# Altium PCB PCB Layout.PcbDoc (part 1 of 3)
Units mm, origin at the board's own origin, x right, y up, seen from the top; angles counter-clockwise.
Board outline 100.03 x 55.01 mm, 4 copper layers (Top Layer, Signal Layer 2, Signal Layer 1, Bottom Layer), stack 0.779 mm thick; 236 components, 218 nets, 813 pads, 395 vias.
Unrouted connection lines stored in the file: 15.
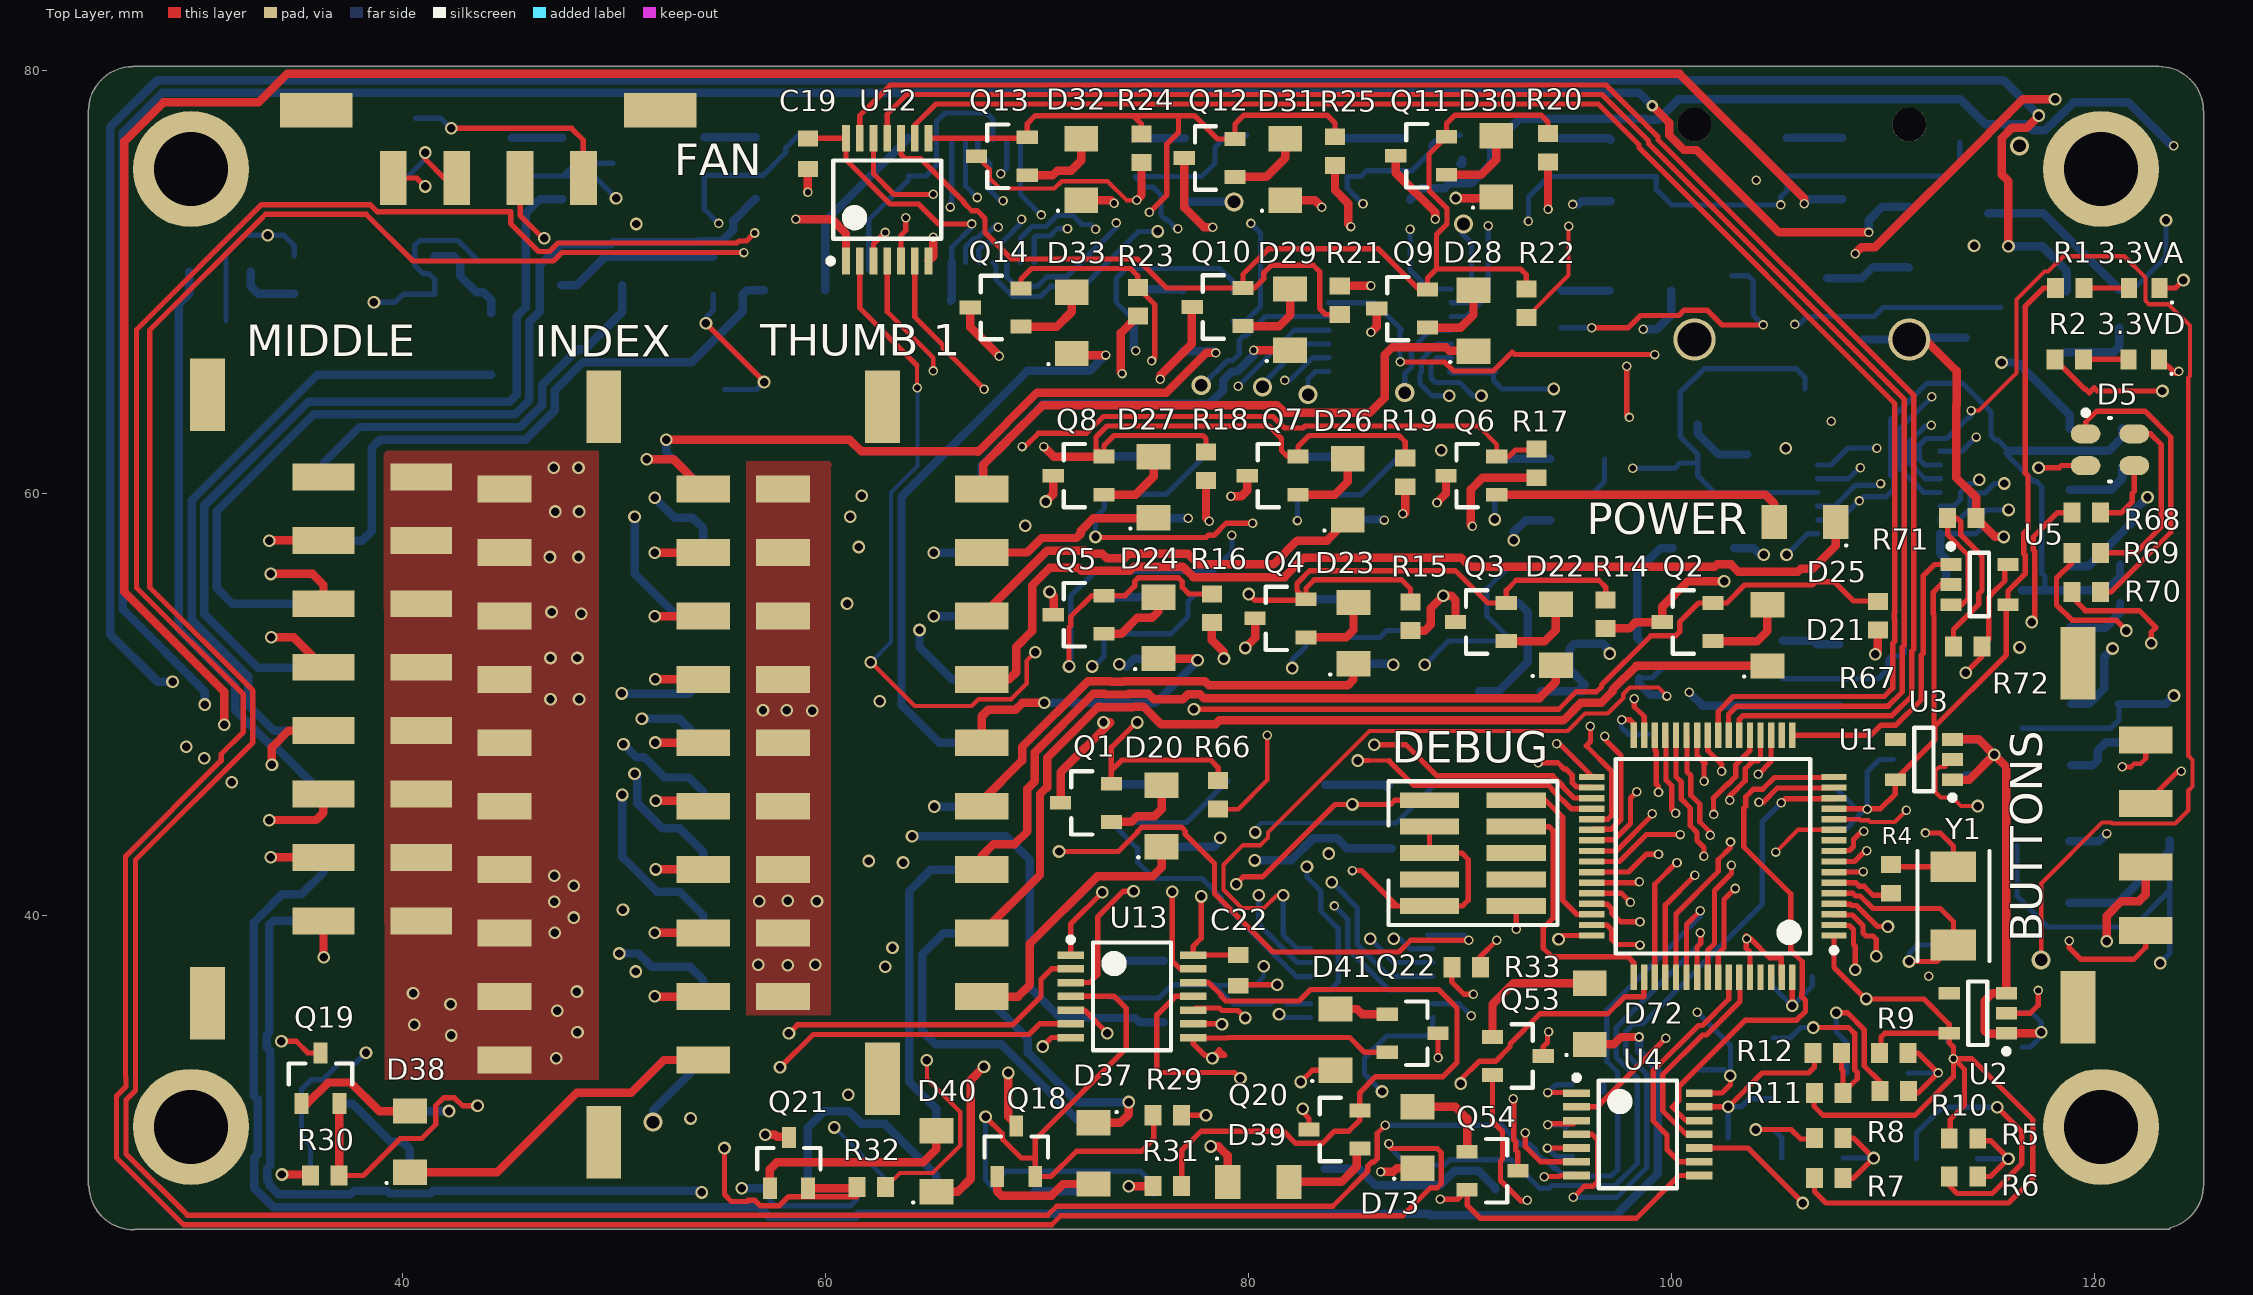
[diagram p0: Top Layer view]
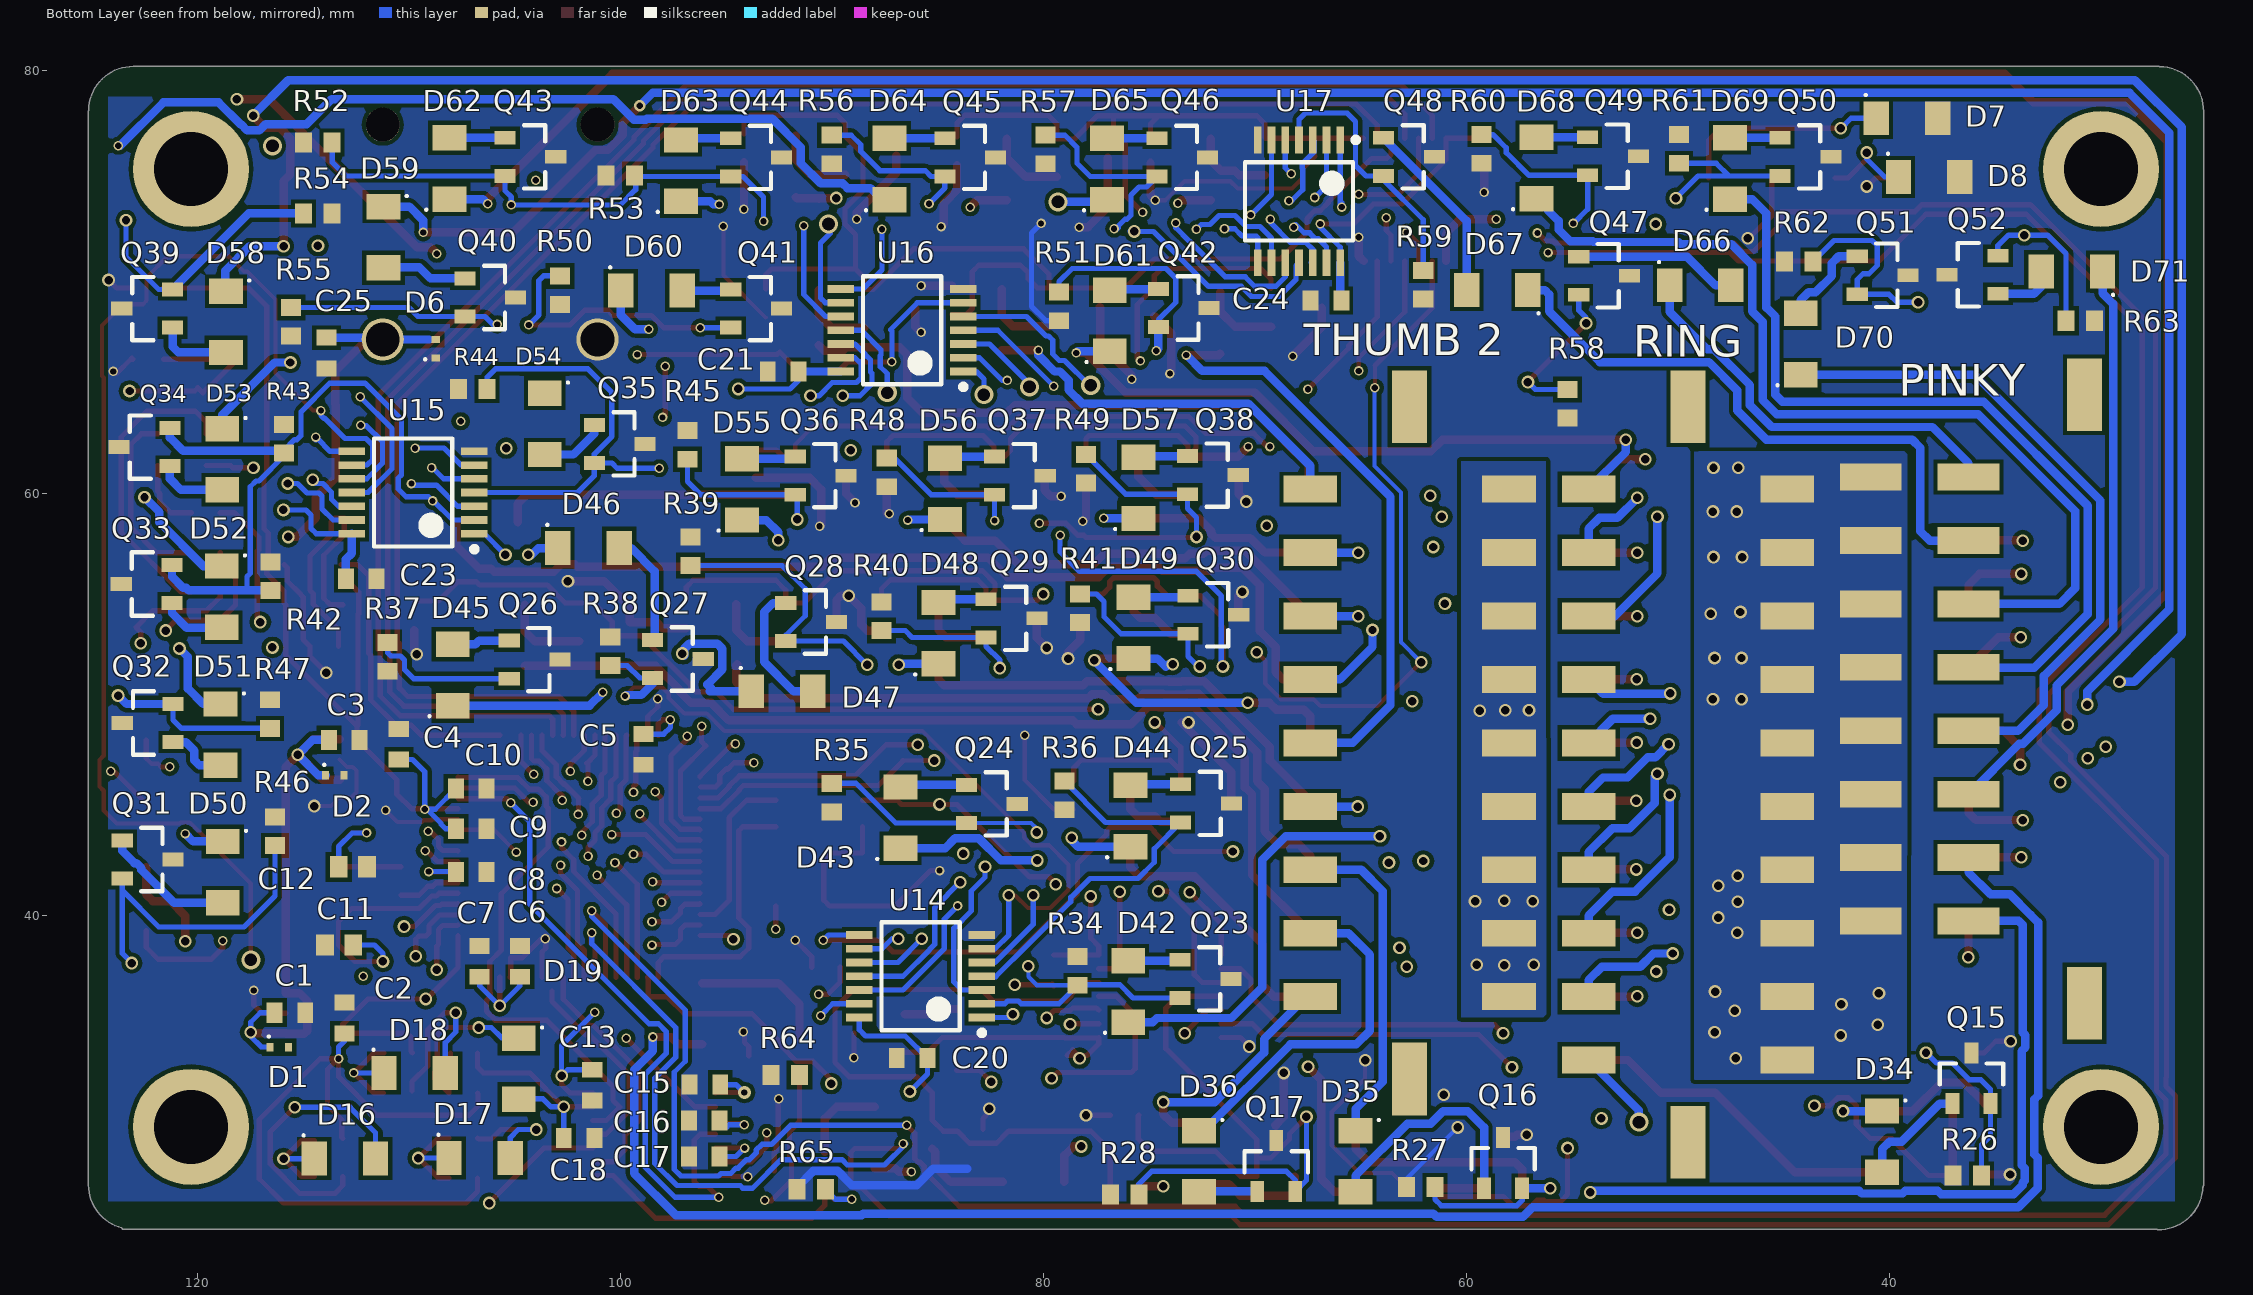
[diagram p1: Bottom Layer view, seen from below]
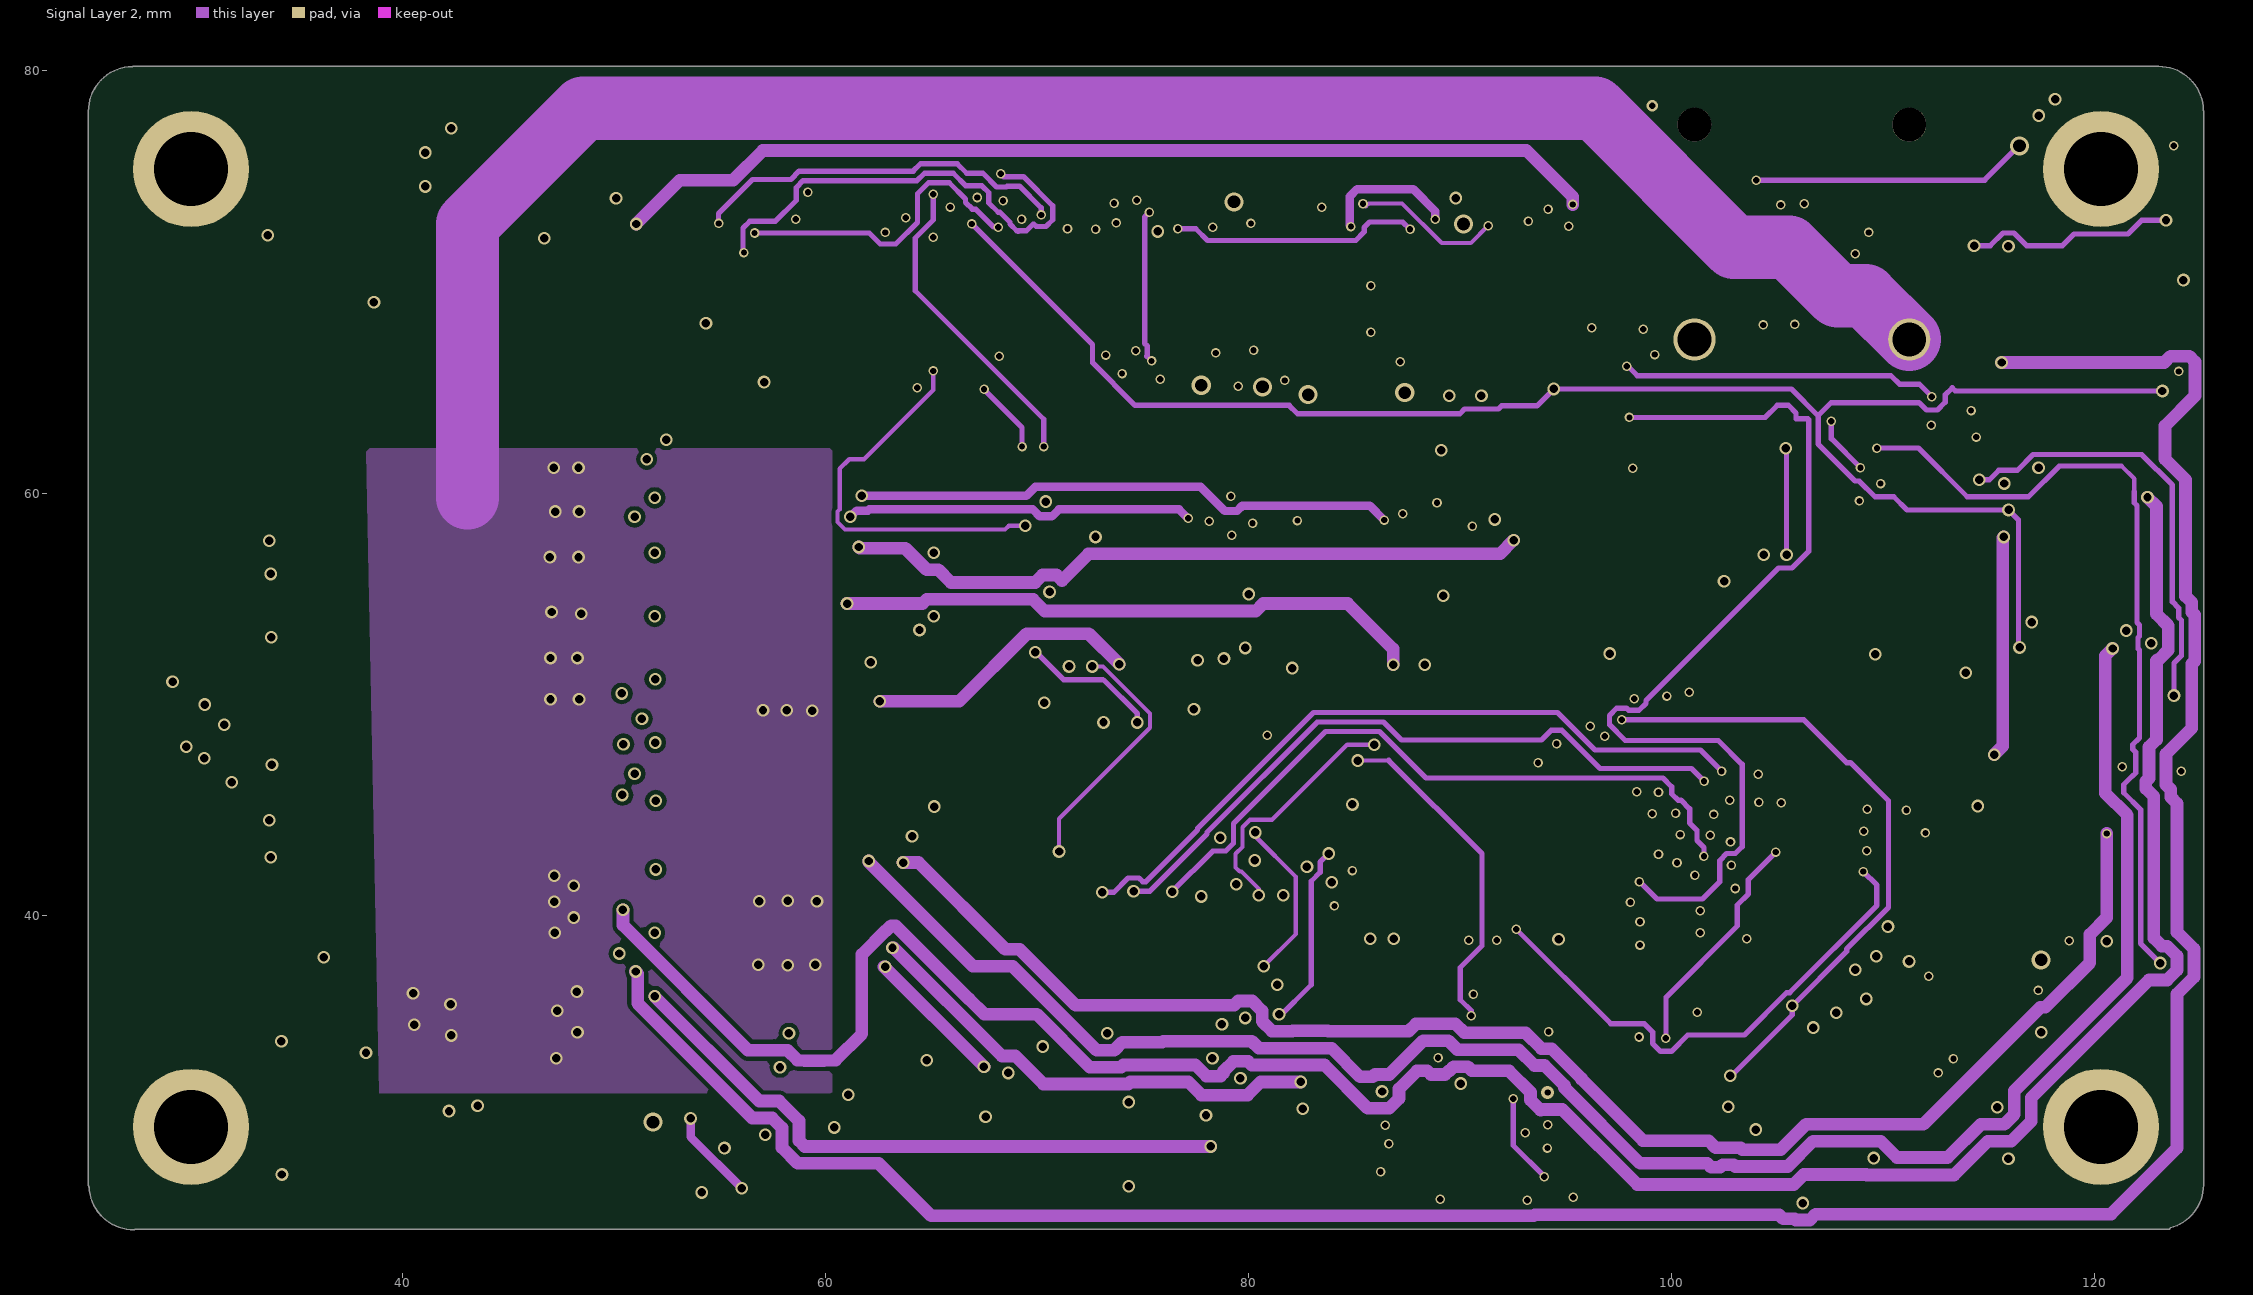
[diagram p2: Signal Layer 2]
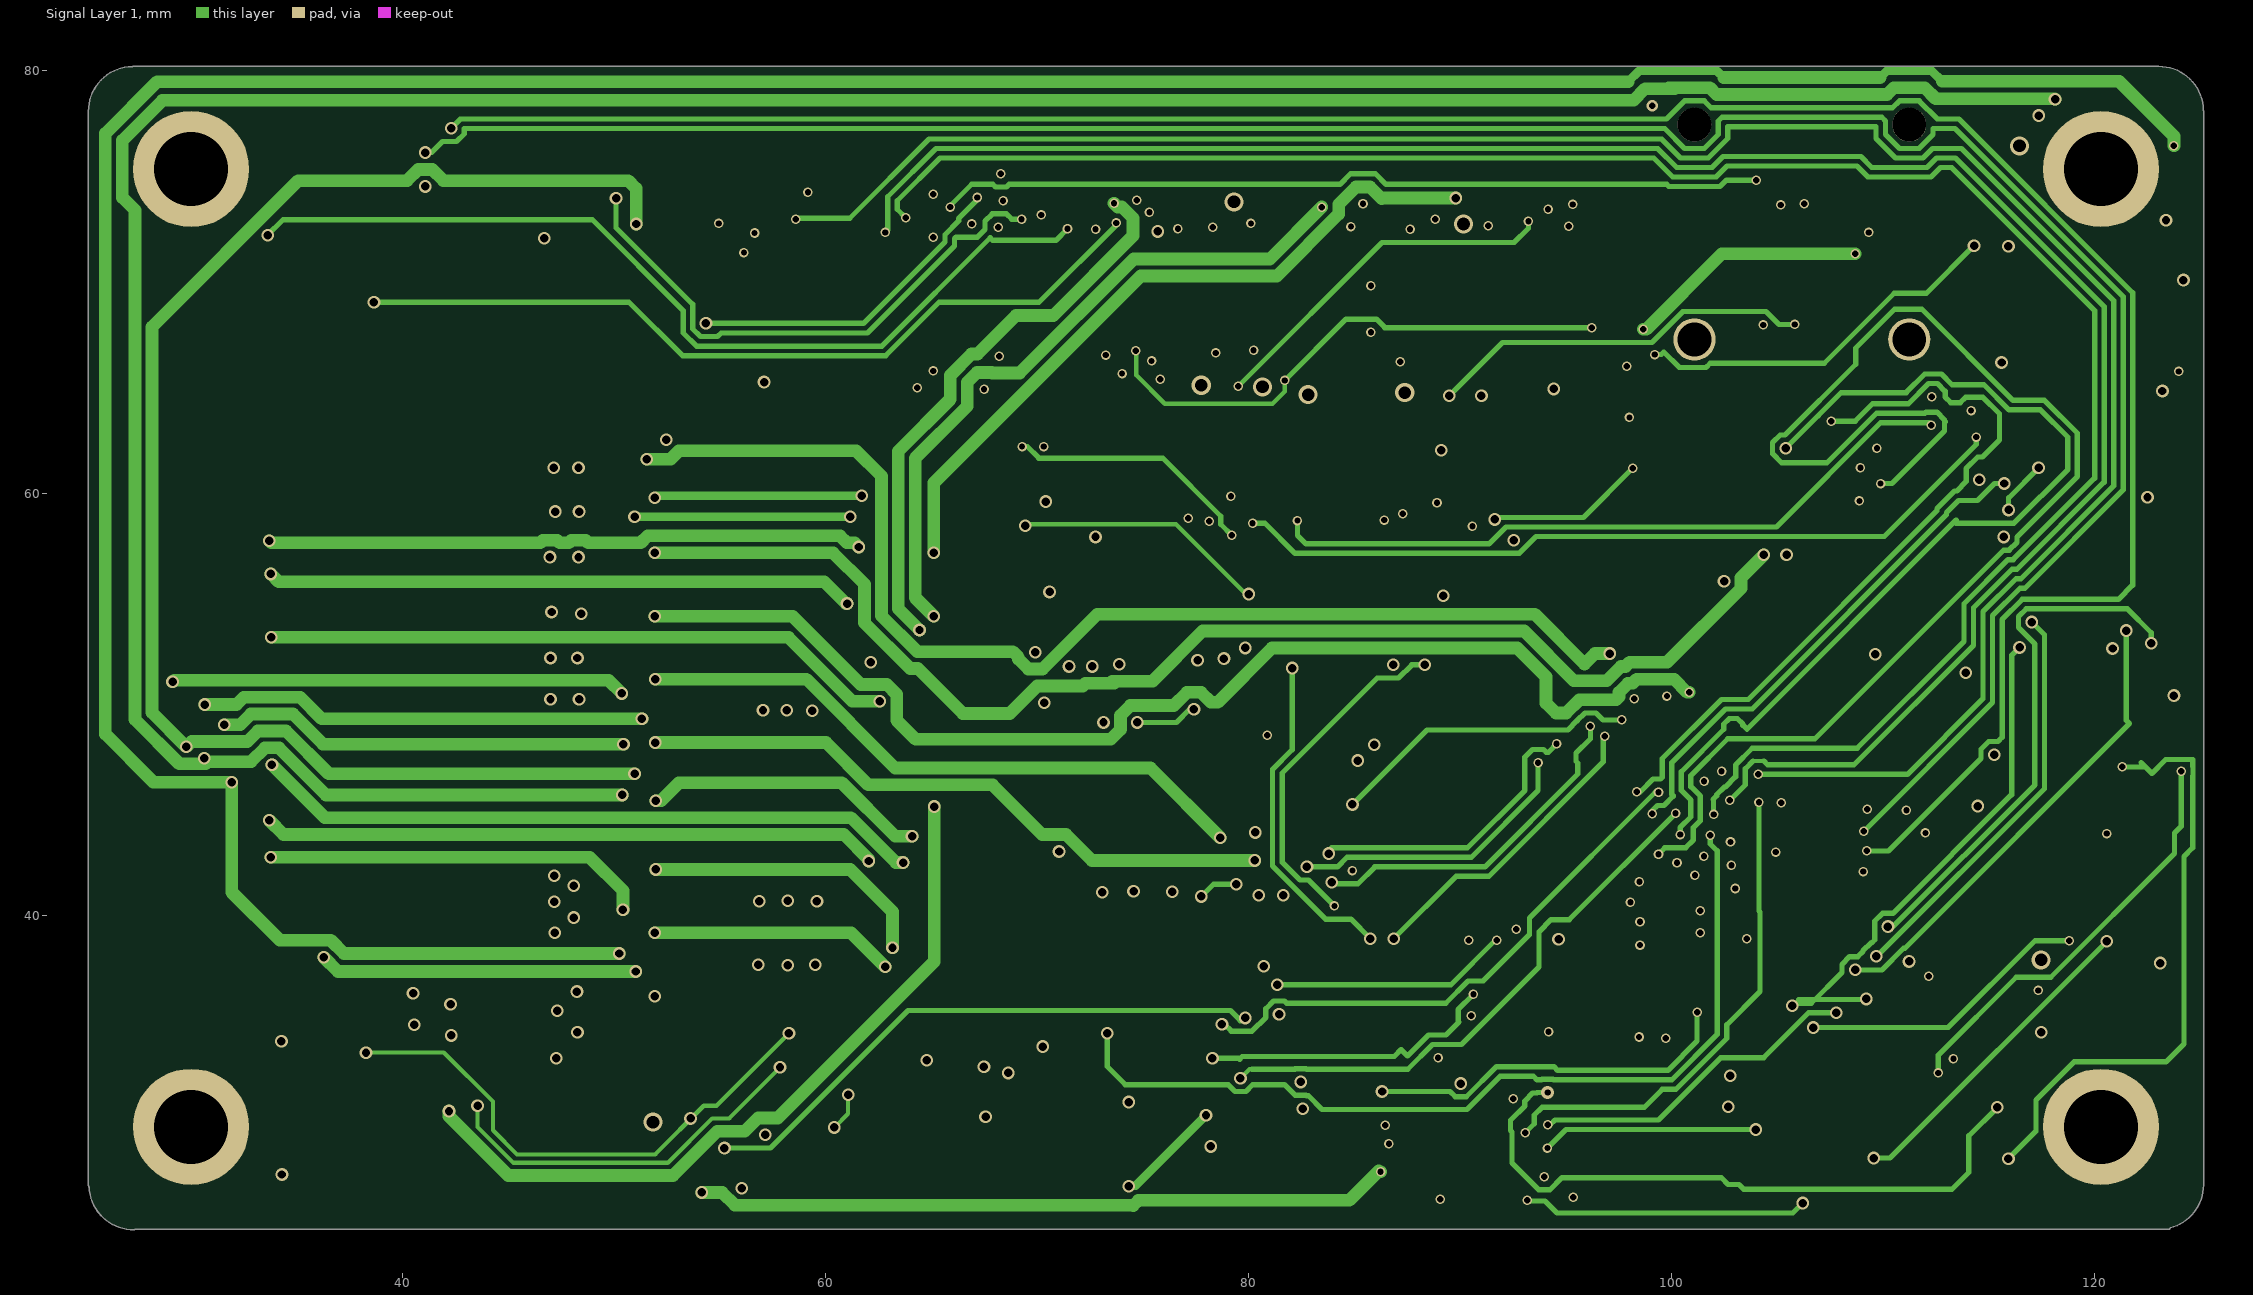
[diagram p3: Signal Layer 1]

## Layer stack, top to bottom
Top Solder: solder mask 0.01, Solder Resist, Dk 3.5
Top Layer: signal copper 0.036
Dielectric 1: prepreg 0.127, FR-4, Dk 4.2
Signal Layer 2: signal copper 0.036
Dielectric 3: core 0.254, Dk 4.2
Signal Layer 1: signal copper 0.036
Dielectric 2: core 0.254, Dk 4.2
Bottom Layer: signal copper 0.036
Bottom Solder: solder mask 0.01, Solder Resist, Dk 3.5

## Board outline
25.176,27.182 cw(c25.25,27.25) 25.15,27.25 25.15,78.047 cw(c25.25,78.052) 25.15,78.051 cw(c27.25,78.069) 27.214,80.169 cw(c27.25,80.075) 27.25,80.175 123.047,80.175 cw(c123.052,80.075) 123.051,80.175 cw(c123.069,78.075) 125.169,78.11 cw(c125.075,78.075) 125.175,78.075 125.175,27.312 cw(c125.075,27.3) 125.176,27.301 cw(c123.075,27.283) 125.176,27.283 cw(c123.075,27.283) 123.597,25.249 cw(c123.501,25.275) 123.501,25.175 27.344,25.175 cw(c27.303,25.266) 27.304,25.166 cw(c27.286,27.278)

## Design rules (kind name [scope] priority, off if disabled: settings)
Clearance [All] p1: gap=0.2 except(0.18: Arc-Arc)
ComponentClearance [All] p1: gap=0.75 collisioncheckmode=3 verticalgap=2540 showdistances=FALSE
DiffPairsRouting [All] p1: maxlimit=10 minlimit=0.2 mostfreqgap=0.25 toplayer_minwidth=0.2 toplayer_maxwidth=10 toplayer_prefwidth=0.25 midlayer1_minwidth=0.2 midlayer1_maxwidth=10 midlayer1_prefwidth=0.25 midlayer2_minwidth=0.2 midlayer2_maxwidth=10 midlayer2_prefwidth=0.25 bottomlayer_minwidth=0.2 bottomlayer_maxwidth=10 bottomlayer_prefwidth=0.25 maxuncoupledlength=12.7
Height [All] p1: minheight=0 maxheight=100 prefheight=0
HoleSize [All] p1: absolutevalues=TRUE maxlimit=12 minlimit=0.3 maxpercent=80.000 minpercent=20.000
HoleToHoleClearance [All] p1: gap=0.25 allowstackedmicrovias=TRUE
MinimumSolderMaskSliver [All] p1: minsoldermaskwidth=0.05
PlaneClearance [All] p1: clearance=0.5
PlaneConnect [All] p1: planeconnectstyle=Relief reliefexpansion=0.25 reliefentries=4 reliefconductorwidth=0.25 reliefairgap=0.25
PolygonConnect [All] p1: connectstyle=Direct reliefconductorwidth=0.25 reliefentries=4 polygonreliefangle="90 Angle" airgapwidth=0.15
RoutingCorners [All] p1: cornerstyle=45-Degree minsetback=2.5 maxsetback=2.5
RoutingVias [All] p1: holewidth=0.4 width=0.6 viastyle="Through Hole" minholewidth=0.3 minwidth=0.45 maxholewidth=0.4 maxwidth=0.6
SilkToSilkClearance [All] p1: silktosilkclearance=0.25
SilkToSolderMaskClearance [IsPad] p1: minsilkscreentomaskgap=0.1 clearancetoexposedcopper=TRUE
SolderMaskExpansion [All] p1: expansion=0.1
Width [All] p1: maxlimit=3 minlimit=0.2 preferedwidth=0.2 toplayer_maxwidth=0.6 midlayer2_maxwidth=0.6 bottomlayer_maxwidth=0.4 minimp=50.000000 maximp=50.000000 favimp=50.000000
19 further rules are at their usual default settings.

## Classes and differential pairs
component class FLEX_OUTPUT: 0.2 C19 C20 C21 C22 C23 C24 D20 D21 D22 D23 D24 D25 D26 D27 D28 D29 D30 D31 D32 D33 D34 D35 D36 D37 D38 D39 D40 D41 D42 D43 D44 D45 D46 D47 D48 D49 D50 D51 D52 D53 D54 D55 D56 D57 D58 D59 D60 D61 D62 D63 D64 D65 D66 D67 D68 D69 D70 D71 D72 D73 Q1 Q2 Q3 Q4 Q5 Q6 Q7 Q8 Q9 Q10 Q11 Q12 Q13 Q14 Q15 Q16 Q17 Q18 Q19 Q20 Q21 Q22 Q23 Q24 Q25 Q26 Q27 Q28 Q29 Q30 Q31 Q32 Q33 Q34 Q35 Q36 Q37 Q38 Q39 Q40 Q41 Q42 Q43 Q44 Q45 Q46 Q47 Q48 Q49 Q50 Q51 Q52 Q53 Q54 R14 R15 R16 R17 R18 R19 R20 R21 R22 R23 R24 R25 R26 R27 R28 R29 R30 R31 R32 R33 R34 R35 R36 R37 R38 R39 R40 R41 R42 R43 R44 R45 R46 R47 R48 R49 R50 R51 R52 R53 R54 R55 R56 R57 R58 R59 R60 R61 R62 R63 R64 R65 R66 R67 U12 U13 U14 U15 U16 U17
component class FLEX_MCU_CONFIG: 3.3VA 3.3VD BUTTONS C1 C2 C3 C4 C5 C6 C7 C8 C9 C10 C11 C12 C13 C15 C16 C17 C18 C25 D1 D2 D5 D6 D7 D8 D16 D17 D18 D19 DEBUG FAN INDEX J1 J2 J8 MIDDLE PINKY POWER R1 R2 R4 R5 R6 R7 R8 R9 R10 R11 R12 R68 R69 R70 R71 R72 RING "THUMB 1" "THUMB 2" U1 U2 U3 U4 U5 Y1

## Components (designator, comment, footprint, x,y, rotation, side; value= is the part's Value field where it differs from the comment)
3.3VA "LTST-C193KGKT-5A" "Lite-On LTST-C193K-Series (1608)" 122.375,69.7 r0 top (schematic designator D3)
3.3VD "LTST-C193KGKT-5A" "Lite-On LTST-C193K-Series (1608)" 122.35,66.325 r0 top (schematic designator D4)
BUTTONS "Fan Header" 4PIN_POWERHEADER 121.175,48.95 r270 top locked (schematic designator J8)
C1 "" "TDK C-Series (1608)" 115.65,35.425 r0 bottom
C2 "" "TDK C-Series (1608)" 113.075,35.175 r270 bottom
C3 "" "TDK C-Series (1608)" 113.075,48.325 r0 bottom
C4 "" "TDK C-Series (1608)" 110.5,48.125 r270 bottom
C5 "" "TDK C-Series (1608)" 98.925,47.875 r90 bottom
C6 "Cap" "TDK C-Series (1608)" 104.775,37.85 r270 bottom
C7 "" "TDK C-Series (1608)" 106.675,37.85 r270 bottom
C8 "" "TDK C-Series (1608)" 107.075,42.075 r0 bottom
C9 "" "TDK C-Series (1608)" 107.075,44.125 r0 bottom
C10 "" "TDK C-Series (1608)" 107.075,46.025 r0 bottom
C11 "" "Johanson S-Series (1608)" 113.325,38.625 r0 bottom
C12 "" "Johanson S-Series (1608)" 112.675,42.325 r180 bottom
C13 "Cap" "TDK C-Series (1608)" 101.35,32 r90 bottom
C15 "Cap" "TDK C-Series (1608)" 96.025,32.025 r180 bottom
C16 "Cap" "TDK C-Series (1608)" 96.05,30.325 r180 bottom
C17 "Cap" "TDK C-Series (1608)" 96.05,28.625 r180 bottom
C18 "Cap" "TDK C-Series (1608)" 101.975,29.5 r0 bottom
C19 "Cap" "TDK C-Series (1608)" 59.175,76.05 r90 top
C20 "Cap" "TDK C-Series (1608)" 86.225,33.275 r180 bottom
C21 "Cap" "TDK C-Series (1608)" 92.325,65.75 r180 bottom
C22 "Cap" "TDK C-Series (1608)" 79.525,37.425 r90 top
C23 "Cap" "TDK C-Series (1608)" 112.275,55.95 r0 bottom
C24 "Cap" "TDK C-Series (1608)" 66.65,69.1 r180 bottom
C25 "" "TDK C-Series (1608)" 113.925,66.625 r90 bottom
D1 "" DIODE_TVS 116.15,33.8 r180 bottom
D2 "" DIODE_TVS 113.525,46.65 r180 bottom
D5 "Cree CLVBA-FKA-CAEDH8BBB7A363" "Cree CLVBA-FKA-Series (4-SOJ)" 120.75,62.05 r0 top
D6 "Diode BAT17" DIODE_TVS 108.75,66.825 r90 bottom
D7 "Diode 1N4006" DIODE_SHOTTKY 39.175,77.725 r180 bottom
D8 "Diode 1N4006" DIODE_SHOTTKY 38.125,74.95 r180 bottom
D16 "de" DIODE_SHOTTKY 113.05,28.525 r180 bottom
D17 "de" DIODE_SHOTTKY 106.675,28.55 r180 bottom
D18 "de" DIODE_SHOTTKY 109.75,32.575 r180 bottom
D19 "de" DIODE_SHOTTKY 104.825,32.775 r270 bottom
D20 "de" DIODE_SHOTTKY 75.9,44.725 r90 top
D21 "de" DIODE_SHOTTKY 104.55,53.275 r90 top
D22 "de" DIODE_SHOTTKY 94.55,53.3 r90 top
D23 "de" DIODE_SHOTTKY 84.975,53.375 r90 top
D24 "de" DIODE_SHOTTKY 75.75,53.625 r90 top
D25 "de" DIODE_SHOTTKY 106.325,58.625 r180 top
D26 "de" DIODE_SHOTTKY 84.7,60.175 r90 top
D27 "de" DIODE_SHOTTKY 75.525,60.275 r90 top
D28 "de" DIODE_SHOTTKY 90.65,68.15 r90 top
D29 "de" DIODE_SHOTTKY 81.975,68.2 r90 top
D30 "de" DIODE_SHOTTKY 91.725,75.45 r90 top
D31 "de" DIODE_SHOTTKY 81.75,75.3 r90 top
D32 "de" DIODE_SHOTTKY 72.1,75.3 r90 top
D33 "de" DIODE_SHOTTKY 71.65,68.05 r90 top
D34 "de" DIODE_SHOTTKY 40.35,29.325 r270 bottom
D35 "de" DIODE_SHOTTKY 65.25,28.4 r270 bottom
D36 "de" DIODE_SHOTTKY 72.65,28.4 r270 bottom
D37 "de" DIODE_SHOTTKY 72.675,28.775 r270 top
D38 "de" DIODE_SHOTTKY 40.35,29.325 r90 top
D39 "de" DIODE_SHOTTKY 80.475,27.425 r0 top
D40 "de" DIODE_SHOTTKY 65.25,28.4 r90 top
D41 "de" DIODE_SHOTTKY 84.125,34.15 r90 top
D42 "de" DIODE_SHOTTKY 76,36.425 r90 bottom
D43 "de" DIODE_SHOTTKY 86.775,44.65 r90 bottom
D44 "de" DIODE_SHOTTKY 75.9,44.725 r90 bottom
D45 "de" DIODE_SHOTTKY 107.95,51.4 r90 bottom
D46 "de" DIODE_SHOTTKY 101.525,57.4 r180 bottom
D47 "de" DIODE_SHOTTKY 92.375,50.625 r180 bottom
D48 "de" DIODE_SHOTTKY 84.975,53.375 r90 bottom
D49 "de" DIODE_SHOTTKY 75.75,53.625 r90 bottom
D50 "de" DIODE_SHOTTKY 118.825,42.075 r270 bottom
D51 "de" DIODE_SHOTTKY 118.925,48.575 r270 bottom
D52 "de" DIODE_SHOTTKY 118.875,55.1 r270 bottom
D53 "de" DIODE_SHOTTKY 118.85,61.6 r270 bottom
D54 "de" DIODE_SHOTTKY 103.6,63.275 r270 bottom
D55 "de" DIODE_SHOTTKY 94.275,60.175 r90 bottom
D56 "de" DIODE_SHOTTKY 84.675,60.2 r90 bottom
D57 "de" DIODE_SHOTTKY 75.525,60.25 r90 bottom
D58 "de" DIODE_SHOTTKY 118.675,68.1 r270 bottom
D59 "de" DIODE_SHOTTKY 111.225,72.1 r270 bottom
D60 "de" DIODE_SHOTTKY 98.55,69.575 r180 bottom
D61 "de" DIODE_SHOTTKY 76.875,68.15 r90 bottom
D62 "de" DIODE_SHOTTKY 108.1,75.35 r90 bottom
D63 "de" DIODE_SHOTTKY 97.15,75.25 r90 bottom
D64 "de" DIODE_SHOTTKY 87.3,75.325 r90 bottom
D65 "de" DIODE_SHOTTKY 77,75.325 r90 bottom
D66 "de" DIODE_SHOTTKY 48.95,69.825 r180 bottom
D67 "de" DIODE_SHOTTKY 58.55,69.6 r0 bottom
D68 "de" DIODE_SHOTTKY 56.7,75.375 r90 bottom
D69 "de" DIODE_SHOTTKY 47.55,75.35 r90 bottom
D70 "de" DIODE_SHOTTKY 44.2,67.05 r90 bottom
D71 "de" DIODE_SHOTTKY 31.375,70.475 r0 bottom
D72 "de" DIODE_SHOTTKY 96.15,35.375 r90 top
D73 "de" DIODE_SHOTTKY 88,29.525 r90 top
DEBUG "Cortex Debugger" "Samtec FTSH-105-01-L-DV-K" 90.625,42.975 r0 top (schematic designator J7)
FAN "Fan Header" 4PIN_POWERHEADER 49.2,76.175 r180 top locked (schematic designator J10)
INDEX "20 Pin Header" 20PIN_UP_CONNECTOR 52.95,60.825 r270 top locked (schematic designator J1)
MIDDLE "16" 16PIN_RA_CONNECTOR 39.425,61.4 r270 top locked (schematic designator J5)
PINKY "16" 16PIN_RA_CONNECTOR 39.425,39.125 r90 bottom locked (schematic designator J6)
POWER "Power Header" 2PIN_TERMINAL_BLOCK 101.1,77.425 r0 top locked (schematic designator J9)
Q1 "" "MOSFET SOT90P236X110-3N" 72.325,45.35 r180 top
Q2 "" "MOSFET SOT90P236X110-3N" 100.775,53.9 r180 top
Q3 "" "MOSFET SOT90P236X110-3N" 91,53.9 r180 top
Q4 "" "MOSFET SOT90P236X110-3N" 81.525,54.075 r180 top
Q5 "" "MOSFET SOT90P236X110-3N" 71.975,54.25 r180 top
Q6 "" "MOSFET SOT90P236X110-3N" 90.55,60.825 r180 top
Q7 "" "MOSFET SOT90P236X110-3N" 81.15,60.825 r180 top
Q8 "" "MOSFET SOT90P236X110-3N" 71.975,60.825 r180 top
Q9 "" "MOSFET SOT90P236X110-3N" 87.275,68.725 r180 top
Q10 "" "MOSFET SOT90P236X110-3N" 78.55,68.8 r180 top
Q11 "" "MOSFET SOT90P236X110-3N" 88.175,75.95 r180 top
Q12 "" "MOSFET SOT90P236X110-3N" 78.175,75.85 r180 top
Q13 "" "MOSFET SOT90P236X110-3N" 68.35,75.925 r180 top
Q14 "" "MOSFET SOT90P236X110-3N" 68.05,68.775 r180 top
Q15 "" "MOSFET SOT90P236X110-3N" 36.125,32.325 r90 bottom
Q16 "" "MOSFET SOT90P236X110-3N" 58.275,28.325 r90 bottom
Q17 "" "MOSFET SOT90P236X110-3N" 69,28.175 r90 bottom
Q18 "" "MOSFET SOT90P236X110-3N" 69.025,28.875 r90 top
Q19 "" "MOSFET SOT90P236X110-3N" 36.125,32.325 r90 top
Q20 "" "MOSFET SOT90P236X110-3N" 84.075,29.9 r180 top
Q21 "" "MOSFET SOT90P236X110-3N" 58.275,28.325 r90 top
Q22 "" "MOSFET SOT90P236X110-3N" 87.775,34.45 r0 top
Q23 "" "MOSFET SOT90P236X110-3N" 72.35,37.025 r180 bottom
Q24 "" "MOSFET SOT90P236X110-3N" 82.45,45.3 r180 bottom
Q25 "" "MOSFET SOT90P236X110-3N" 72.325,45.325 r180 bottom
Q26 "" "MOSFET SOT90P236X110-3N" 104.075,52.125 r180 bottom
Q27 "" "MOSFET SOT90P236X110-3N" 97.3,52.15 r180 bottom
Q28 "" "MOSFET SOT90P236X110-3N" 91,53.9 r180 bottom
Q29 "" "MOSFET SOT90P236X110-3N" 81.525,54.075 r180 bottom
Q30 "" "MOSFET SOT90P236X110-3N" 71.975,54.25 r180 bottom
Q31 "" "MOSFET SOT90P236X110-3N" 122.375,42.675 r180 bottom
Q32 "" "MOSFET SOT90P236X110-3N" 122.375,49.125 r0 bottom
Q33 "" "MOSFET SOT90P236X110-3N" 122.425,55.7 r0 bottom
Q34 "" "MOSFET SOT90P236X110-3N" 122.525,62.175 r0 bottom
Q35 "" "MOSFET SOT90P236X110-3N" 100.05,62.325 r180 bottom
Q36 "" "MOSFET SOT90P236X110-3N" 90.55,60.825 r180 bottom
Q37 "" "MOSFET SOT90P236X110-3N" 81.125,60.825 r180 bottom
Q38 "" "MOSFET SOT90P236X110-3N" 72,60.85 r180 bottom
Q39 "" "MOSFET SOT90P236X110-3N" 122.4,68.725 r0 bottom
Q40 "" "MOSFET SOT90P236X110-3N" 106.175,69.25 r180 bottom
Q41 "" "MOSFET SOT90P236X110-3N" 93.6,68.725 r180 bottom
Q42 "" "MOSFET SOT90P236X110-3N" 73.375,68.75 r180 bottom
Q43 "" "MOSFET SOT90P236X110-3N" 104.275,75.9 r180 bottom
Q44 "" "MOSFET SOT90P236X110-3N" 93.6,75.875 r180 bottom
Q45 "" "MOSFET SOT90P236X110-3N" 83.475,75.875 r180 bottom
Q46 "" "MOSFET SOT90P236X110-3N" 73.45,75.875 r180 bottom
Q47 "" "MOSFET SOT90P236X110-3N" 53.5,70.275 r180 bottom
Q48 "" "MOSFET SOT90P236X110-3N" 62.725,75.9 r180 bottom
Q49 "" "MOSFET SOT90P236X110-3N" 53.075,75.925 r180 bottom
Q50 "" "MOSFET SOT90P236X110-3N" 43.975,75.9 r180 bottom
Q51 "" "MOSFET SOT90P236X110-3N" 40.325,70.3 r180 bottom
Q52 "" "MOSFET SOT90P236X110-3N" 36.075,70.325 r0 bottom
Q53 "" "MOSFET SOT90P236X110-3N" 92.75,33.375 r0 top
Q54 "" "MOSFET SOT90P236X110-3N" 91.55,27.95 r0 top
R1 "" "Panasonic ERJ-Series (1608)" 118.85,69.7 r180 top
R2 "" "Panasonic ERJ-Series (1608)" 118.825,66.325 r180 top
R4 "" "Panasonic ERJ-Series (1608)" 110.4,41.75 r270 top
R5 "" "Panasonic ERJ-Series (1608)" 113.825,29.475 r0 top
R6 "" "Panasonic ERJ-Series (1608)" 113.825,27.675 r0 top
R7 "" "Panasonic ERJ-Series (1608)" 107.45,27.6 r0 top
R8 "" "Panasonic ERJ-Series (1608)" 107.45,29.5 r0 top
R9 "" "Panasonic ERJ-Series (1608)" 110.525,33.525 r0 top
R10 "" "Panasonic ERJ-Series (1608)" 110.55,31.725 r0 top
R11 "" "Panasonic ERJ-Series (1608)" 107.45,31.625 r0 top
R12 "" "Panasonic ERJ-Series (1608)" 107.375,33.525 r0 top
R14 "" "Panasonic ERJ-Series (1608)" 96.9,54.275 r90 top
R15 "" "Panasonic ERJ-Series (1608)" 87.675,54.175 r90 top
R16 "" "Panasonic ERJ-Series (1608)" 78.275,54.55 r90 top
R17 "" "Panasonic ERJ-Series (1608)" 93.625,61.4 r90 top
R18 "" "Panasonic ERJ-Series (1608)" 78,61.275 r90 top
R19 "" "Panasonic ERJ-Series (1608)" 87.425,60.975 r90 top
R20 "" "Panasonic ERJ-Series (1608)" 94.175,76.325 r90 top
R21 "" "Panasonic ERJ-Series (1608)" 84.325,69.125 r270 top
R22 "" "Panasonic ERJ-Series (1608)" 93.15,68.975 r90 top
R23 "" "Panasonic ERJ-Series (1608)" 74.775,69.05 r90 top
R24 "" "Panasonic ERJ-Series (1608)" 74.95,76.3 r90 top
R25 "" "Panasonic ERJ-Series (1608)" 84.1,76.175 r90 top
R26 "" "Panasonic ERJ-Series (1608)" 36.325,27.725 r180 bottom
R27 "" "Panasonic ERJ-Series (1608)" 62.175,27.175 r180 bottom
R28 "" "Panasonic ERJ-Series (1608)" 76.175,26.825 r180 bottom
R29 "" "Panasonic ERJ-Series (1608)" 76.175,30.575 r180 top
R30 "" "Panasonic ERJ-Series (1608)" 36.325,27.725 r0 top
R31 "" "Panasonic ERJ-Series (1608)" 76.175,27.225 r0 top
R32 "" "Panasonic ERJ-Series (1608)" 62.175,27.175 r180 top
R33 "" "Panasonic ERJ-Series (1608)" 90.3,37.575 r180 top
R34 "" "Panasonic ERJ-Series (1608)" 78.4,37.4 r270 bottom
R35 "" "Panasonic ERJ-Series (1608)" 90.025,45.6 r90 bottom
R36 "" "Panasonic ERJ-Series (1608)" 79.025,45.7 r90 bottom
R37 "" "Panasonic ERJ-Series (1608)" 111.025,52.25 r90 bottom
R38 "" "Panasonic ERJ-Series (1608)" 100.5,52.525 r270 bottom
R39 "" "Panasonic ERJ-Series (1608)" 96.7,57.25 r270 bottom
R40 "" "Panasonic ERJ-Series (1608)" 87.675,54.175 r270 bottom
R41 "" "Panasonic ERJ-Series (1608)" 78.275,54.55 r90 bottom
R42 "" "Panasonic ERJ-Series (1608)" 116.575,56.075 r270 bottom
R43 "" "Panasonic ERJ-Series (1608)" 115.925,62.575 r270 bottom
R44 "" "Panasonic ERJ-Series (1608)" 107,64.925 r180 bottom
R45 "" "Panasonic ERJ-Series (1608)" 96.85,62.275 r270 bottom
R46 "" "Panasonic ERJ-Series (1608)" 116.35,44 r270 bottom
R47 "" "Panasonic ERJ-Series (1608)" 116.6,49.55 r270 bottom
R48 "" "Panasonic ERJ-Series (1608)" 87.425,60.975 r90 bottom
R49 "" "Panasonic ERJ-Series (1608)" 78,61.15 r90 bottom
R50 "" "Panasonic ERJ-Series (1608)" 102.875,69.6 r90 bottom
R51 "" "Panasonic ERJ-Series (1608)" 79.275,68.825 r90 bottom
R52 "" "Panasonic ERJ-Series (1608)" 114.325,76.575 r180 bottom
R53 "" "Panasonic ERJ-Series (1608)" 100.025,75.025 r180 bottom
R54 "" "Panasonic ERJ-Series (1608)" 114.325,73.225 r0 bottom
R55 "" "Panasonic ERJ-Series (1608)" 115.6,68.1 r90 bottom
R56 "" "Panasonic ERJ-Series (1608)" 90.025,76.25 r90 bottom
R57 "" "Panasonic ERJ-Series (1608)" 79.925,76.25 r90 bottom
R58 "" "Panasonic ERJ-Series (1608)" 55.225,64.225 r90 bottom
R59 "" "Panasonic ERJ-Series (1608)" 62.05,69.85 r90 bottom
R60 "" "Panasonic ERJ-Series (1608)" 59.3,76.275 r90 bottom
R61 "" "Panasonic ERJ-Series (1608)" 49.95,76.275 r270 bottom
R62 "" "Panasonic ERJ-Series (1608)" 44.3,70.95 r180 bottom
R63 "" "Panasonic ERJ-Series (1608)" 30.975,68.15 r0 bottom
R64 "" "Panasonic ERJ-Series (1608)" 92.225,32.475 r180 bottom
R65 "" "Panasonic ERJ-Series (1608)" 91,27.075 r180 bottom
R66 "" "Panasonic ERJ-Series (1608)" 78.575,45.725 r90 top
R67 "" "Panasonic ERJ-Series (1608)" 109.775,54.2 r90 top
R68 "" "Panasonic ERJ-Series (1608)" 119.625,59.075 r0 top
R69 "" "Panasonic ERJ-Series (1608)" 119.625,57.175 r0 top
R70 "" "Panasonic ERJ-Series (1608)" 119.625,55.325 r180 top
R71 "" "Panasonic ERJ-Series (1608)" 113.75,58.825 r180 top
R72 "" "Panasonic ERJ-Series (1608)" 114.025,52.75 r0 top
RING "20 Pin Header" 20PIN_UP_CONNECTOR 52.96,32.55 r90 bottom locked (schematic designator J2)
"THUMB 1" "18 Pin Header" 18PIN_UP_CONNECTOR 66.125,60.825 r270 top locked (schematic designator J3)
"THUMB 2" "18 Pin Header" 18PIN_UP_CONNECTOR 66.125,35.55 r90 bottom locked (schematic designator J4)
U1 "STM32F030R8T6" MCU 101.975,42.825 r180 top
U2 "MIC5225-3.3YM5-TR" "LINEAR REGULATOR SOT95P280X145-5N" 114.5,35.4 r180 top
U3 "MIC5225-3.3YM5-TR" "LINEAR REGULATOR SOT95P280X145-5N" 111.95,47.4 r180 top
U4 "MC74VHCT50A" "NONINVERTING BUFFER - DUPLICATE" 98.425,29.675 r0 top
U5 "TSV991ILT" "LINEAR REGULATOR SOT95P280X145-5N" 114.575,55.675 r0 top
U12 "MC74VHCT50A" "NONINVERTING BUFFER - DUPLICATE" 62.925,73.875 r90 top
U13 "MC74VHCT50A" "NONINVERTING BUFFER - DUPLICATE" 74.5,36.2 r0 top
U14 "MC74VHCT50A" "NONINVERTING BUFFER - DUPLICATE" 85.825,37.15 r0 bottom
U15 "MC74VHCT50A" "NONINVERTING BUFFER - DUPLICATE" 109.825,60.025 r0 bottom
U16 "MC74VHCT50A" "NONINVERTING BUFFER - DUPLICATE" 86.7,67.7 r0 bottom
U17 "MC74VHCT50A" "NONINVERTING BUFFER - DUPLICATE" 67.925,73.8 r270 bottom
Y1 "" "Abracon ABM3-8.000MHZ-D2Y-T (2-DFN)" 113.35,40.475 r270 top

## Footprints (in the part's own frame and the unit in brackets; to place one, negate y for a bottom-side part, rotate by r counter-clockwise, add the part's x,y. Pads: shape width x height; smd on the part's side, far side on the other; paste and mask are expansions set on the pad)
2PIN_TERMINAL_BLOCK [mm] "2 Position Wire to Board Terminal Block Horizontal with Board 0.400\" (10.16mm) Through Hole"
  round 2 hole 1.6: 1(10.16,-10.16) 2(0,-10.16)
  round 1.6 hole 1.6: ""(0,0) ""(10.16,0)
  body extent -5.08,-16.9 15.24,1.6, height 28.5
4PIN_POWERHEADER [mm]
  rect 1.27x2.54 smd: 1(0.635,1.27) 2(3.635,1.27) 3(6.635,1.27) 4(9.635,1.27)
  rect 3.43x1.65 smd: ""(-3,-1.93) ""(13.27,-1.93)
  body extent -3,-3 13,3, height 9.24
16PIN_RA_CONNECTOR [mm] "662 0xx 231 722"
  rect 1.27x2.92 smd: 1(21.635,-3.16) 2(18.635,-3.16) 3(15.635,-3.16) 4(12.635,-3.16) 5(9.635,-3.16) 6(6.635,-3.16) 7(3.635,-3.16) 8(0.635,-3.16) 9(0.635,1.46) 10(3.635,1.46) 11(6.635,1.46) 12(9.635,1.46) 13(12.635,1.46) 14(15.635,1.46) 15(18.635,1.46) 16(21.635,1.46)
  rect 3.43x1.65 smd: ""(-3.26,-8.64) ""(25.53,-8.64)
  body extent -4.43,-13.27 26.68,2.62, height 8.83
18PIN_UP_CONNECTOR [mm] "662 0xx 231 822"
  rect 1.27x2.54 smd: 1(24.635,1.27) 2(21.635,1.27) 3(18.635,1.27) 4(15.635,1.27) 5(12.635,1.27) 6(9.635,1.27) 7(6.635,1.27) 8(3.635,1.27) 9(0.635,1.27) 10(0.635,-8.13) 11(3.635,-8.13) 12(6.635,-8.13) 13(9.635,-8.13) 14(12.635,-8.13) 15(15.635,-8.13) 16(18.635,-8.13) 17(21.635,-8.13) 18(24.635,-8.13)
  rect 3.43x1.65 smd: ""(-3.26,-3.43) ""(28.53,-3.43)
  body extent -4.97,-9.07 30.22,2.32, height 9.95
20PIN_UP_CONNECTOR [mm] "662 0xx 231 822"
  rect 1.27x2.54 smd: 1(27.635,1.27) 2(24.635,1.27) 3(21.635,1.27) 4(18.635,1.27) 5(15.635,1.27) 6(12.635,1.27) 7(9.635,1.27) 8(6.635,1.27) 9(3.635,1.27) 10(0.635,1.27) 11(0.635,-8.13) 12(3.635,-8.13) 13(6.635,-8.13) 14(9.635,-8.13) 15(12.635,-8.13) 16(15.635,-8.13) 17(18.635,-8.13) 18(21.635,-8.13) 19(24.635,-8.13) 20(27.635,-8.13)
  rect 3.43x1.65 smd: ""(-3.26,-3.43) ""(31.53,-3.43)
  body extent -4.95,-9.12 33.25,2.27, height 9.95
"Abracon ABM3-8.000MHZ-D2Y-T (2-DFN)" [mm] "8MHz +/-30ppm Ceramic Crystal"
  rect 1.45x2.15 smd: 1(-1.85,0) 2(1.85,0)
  silkscreen extent -2.6,-1.7 2.6,1.7, body extent -2.5,-1.6 2.5,1.6, height 1.3
"Cree CLVBA-FKA-Series (4-SOJ)" [mm] "RGB LED"
  oval 1.4x0.9 smd: 1(-1.15,0.75) 2(-1.15,-0.75) 3(1.15,-0.75) 4(1.15,0.75)
  silkscreen extent -1.27,-1.5 0.05,1.87, body extent -1.7,-1.5 1.7,1.5, height 2.1
DIODE_SHOTTKY [mm] "PMEG6020AELR"
  rect 1.2x1.6 smd: 1(-1.45,0) 2(1.45,0)
  silkscreen extent -2,1.05 -1.9,1.15, body extent -1.4,-0.95 1.4,0.95, height 1.1
DIODE_TVS [mm] "DF2S10FS_SOD-923"
  rect 0.325x0.4 smd: 1(-0.437,0) 2(0.437,0)
  silkscreen extent -0.55,0.45 -0.45,0.55, body extent -0.43,-0.33 0.43,0.33, height 0.45
"Johanson S-Series (1608)" [mm] "High-Q Multilayer Ceramic Chip Capacitor"
  rect 0.84x1 smd: 1(-0.67,0) 2(0.67,0)
  body extent -0.86,-0.48 0.86,0.48, height 0.89
"LINEAR REGULATOR SOT95P280X145-5N" [mm] "SOT23, 5-Leads, Body 2.90x2.80mm, Pitch 0.95mm, IPC Medium Density"
  rect 1x0.6 smd: 1(-1.35,0.95) 2(-1.35,0) 3(-1.35,-0.95) 4(1.35,-0.95) 5(1.35,0.95)
  silkscreen extent -1.48,-1.5 0.45,1.92, body extent -0.85,-1.5 0.85,1.5, height 1.45
"Lite-On LTST-C193K-Series (1608)" [mm] "Chip LED"
  rect 0.75x0.95 smd: 1(-0.725,0) 2(0.725,0)
  silkscreen extent 1.26,-0.74 1.36,-0.64, body extent -0.85,-0.45 0.85,0.45, height 0.35
MCU [mm] "TSQFP, 64-Leads, Body 10.00x10.00mm, Pitch 0.50mm, IPC Medium Density"
  rect 1.2x0.3 smd: 1(-5.725,3.75) 2(-5.725,3.25) 3(-5.725,2.75) 4(-5.725,2.25) 5(-5.725,1.75) 6(-5.725,1.25) 7(-5.725,0.75) 8(-5.725,0.25) 9(-5.725,-0.25) 10(-5.725,-0.75) 11(-5.725,-1.25) 12(-5.725,-1.75) 13(-5.725,-2.25) 14(-5.725,-2.75) 15(-5.725,-3.25) 16(-5.725,-3.75) 33(5.725,-3.75) 34(5.725,-3.25) 35(5.725,-2.75) 36(5.725,-2.25) 37(5.725,-1.75) 38(5.725,-1.25) 39(5.725,-0.75) 40(5.725,-0.25) 41(5.725,0.25) 42(5.725,0.75) 43(5.725,1.25) 44(5.725,1.75) 45(5.725,2.25) 46(5.725,2.75) 47(5.725,3.25) 48(5.725,3.75)
  rect 0.3x1.2 smd: 17(-3.75,-5.725) 18(-3.25,-5.725) 19(-2.75,-5.725) 20(-2.25,-5.725) 21(-1.75,-5.725) 22(-1.25,-5.725) 23(-0.75,-5.725) 24(-0.25,-5.725) 25(0.25,-5.725) 26(0.75,-5.725) 27(1.25,-5.725) 28(1.75,-5.725) 29(2.25,-5.725) 30(2.75,-5.725) 31(3.25,-5.725) 32(3.75,-5.725) 49(3.75,5.725) 50(3.25,5.725) 51(2.75,5.725) 52(2.25,5.725) 53(1.75,5.725) 54(1.25,5.725) 55(0.75,5.725) 56(0.25,5.725) 57(-0.25,5.725) 58(-0.75,5.725) 59(-1.25,5.725) 60(-1.75,5.725) 61(-2.25,5.725) 62(-2.75,5.725) 63(-3.25,5.725) 64(-3.75,5.725)
  silkscreen extent -5.85,-4.6 4.6,4.6, body extent -5,-5 5,5, height 1.6
"MOSFET SOT90P236X110-3N" [mm] "SOT23, 3-Leads, Body 2.90x2.36mm, Pitch 0.90mm, IPC Medium Density"
  rect 1x0.65 smd: 1(-1.2,0.9) 2(-1.2,-0.9) 3(1.2,0)
  silkscreen extent -0.3,-1.5 0.7,1.5, body extent -0.7,-1.5 0.7,1.5, height 1.1
"NONINVERTING BUFFER - DUPLICATE" [mm] "TSOP, 14-Leads, Body 5.00x4.40mm, Pitch 0.65mm, IPC Medium Density"
  rect 1.26x0.36 smd: 1(-2.9,1.95) 2(-2.9,1.3) 3(-2.9,0.65) 4(-2.9,0) 5(-2.9,-0.65) 6(-2.9,-1.3) 7(-2.9,-1.95) 8(2.9,-1.95) 9(2.9,-1.3) 10(2.9,-0.65) 11(2.9,0) 12(2.9,0.65) 13(2.9,1.3) 14(2.9,1.95)
  silkscreen extent -3.02,-2.55 1.85,2.8, body extent -2.25,-2.55 2.25,2.55, height 1.2
"Panasonic ERJ-Series (1608)" [mm] "Thick Film Chip Resistor"
  rect 0.8x0.95 smd: 1(-0.675,0) 2(0.675,0)
  body extent -0.87,-0.48 0.87,0.48, height 0.55
"Samtec FTSH-105-01-L-DV-K" [mm] "10-Pin 1.27mm Shrouded Header"
  rect 2.8x0.75 smd: 1(-2.05,2.5) 2(2.05,2.5) 3(-2.05,1.25) 4(2.05,1.25) 5(-2.05,0) 6(2.05,0) 7(-2.05,-1.25) 8(2.05,-1.25) 9(-2.05,-2.5) 10(2.05,-2.5)
  silkscreen extent -4,-3.4 4,3.4, body extent -2.92,-3.14 2.92,3.14, height 6.11
"TDK C-Series (1608)" [mm] "Multilayer Ceramic Chip Capacitor"
  rect 0.75x0.95 smd: 1(-0.725,0) 2(0.725,0)
  body extent -0.85,-0.45 0.85,0.45, height 1.25

## Part data
3.3VA 3.3VD: library part LED0, "Typical INFRARED GaAs LED"
C1 C2 C3 C4 C5 C7 C8 C9 C10 C11 C12 C25: library part Cap, "Capacitor"
C6 C13 C15 C16 C17 C18 C19 C20 C21 C22 C23 C24: "Capacitor"
D1 D2: library part "Diode 10TQ035", "Schottky Rectifier"
D5: "RGB LED"
D6: "Silicon RF Schottky Diode for Mixer Applications in the VHF/UHF Range"
D7 D8: "1 Amp General Purpose Rectifier"
D16 D17 D18 D19 D20 D21 D22 D23 D24 D25 D26 D27 D28 D29 D30 D31 D32 D33 D34 D35 D36 D37 D38 D39 D40 D41 D42 D43 D44 D45 D46 D47 D48 D49 D50 D51 D52 D53 D54 D55 D56 D57 D58 D59 D60 D61 D62 D63 D64 D65 D66 D67 D68 D69 D70 D71 D72 D73: library part Diode, "Default Diode"
DEBUG: "Header"
INDEX RING: "20 position header"
MIDDLE PINKY: "16 Position header"
Q1 Q2 Q3 Q4 Q5 Q6 Q7 Q8 Q9 Q10 Q11 Q12 Q13 Q14 Q15 Q16 Q17 Q18 Q19 Q20 Q21 Q22 Q23 Q24 Q25 Q26 Q27 Q28 Q29 Q30 Q31 Q32 Q33 Q34 Q35 Q36 Q37 Q38 Q39 Q40 Q41 Q42 Q43 Q44 Q45 Q46 Q47 Q48 Q49 Q50 Q51 Q52 Q53 Q54: library part MOSFET-N, "N-Channel MOSFET"
R1 R2 R4 R5 R6 R7 R8 R9 R10 R11 R12 R14 R15 R16 R17 R18 R19 R20 R21 R22 R23 R24 R25 R26 R27 R28 R29 R30 R31 R32 R33 R34 R35 R36 R37 R38 R39 R40 R41 R42 R43 R44 R45 R46 R47 R48 R49 R50 R51 R52 R53 R54 R55 R56 R57 R58 R59 R60 R61 R62 R63 R64 R65 R66 R67 R68 R69 R70 R71 R72: library part Res2, "Resistor"
"THUMB 1" "THUMB 2": "18 Position Header"
U1: "MCU"
U2 U3: "12V-3.3V Linear Regulator"
U4 U12 U13 U14 U15 U16 U17: "6-Channel CMOS Buffer"
U5: library part "STMicroelectronics TSV991ILT", "20MHz Op-Amp"
Y1: library part XTAL, "Crystal Oscillator"

## Free pads (board coordinates)
  round 5.5 hole 3.5: ""(30,30.025) ""(30,75.325) ""(120.325,30.025) ""(120.325,75.325)

## Via types
v1: diameter 0.6, hole 0.4, Top Layer to Bottom Layer, tented top, 220 vias
v2: diameter 0.45, hole 0.3, Top Layer to Bottom Layer, tented top, 162 vias
v3: diameter 0.9, hole 0.6, Top Layer to Bottom Layer, tented top, 9 vias
v4: diameter 0.45/0.6/0.6/0.6 (per signal layer), hole 0.3, Top Layer to Bottom Layer, tented top, 1 vias
v5: diameter 0.6/0.6/0.6/0.6 (per signal layer), hole 0.4, Top Layer to Bottom Layer, tented top, 1 vias
v6: diameter 0.6, hole 0.4, Top Layer to Bottom Layer, tented both sides, 1 vias
v7: diameter 0.54, hole 0.3, Top Layer to Bottom Layer, tented top, 1 vias

## Nets (pads, with @x,y where several pads share a name; then routed paths per layer and width w, separated by ;. In a path a pad name is that pad's centre, name@x,y a point inside that pad or via, vN(x,y) a via of type N, cw(c..) or ccw(c..) an arc to the next point about the centre after c; other vN are vias at no path point)
+3.3VA: C4.2 C9.2 C10.2 R1.2 U1.13 U3.5 U5.2 U5.4 | length 45
  Top Layer w0.25: U1.13@107.7,45.075 109.9,45.075 110.6,45.775 U3.5@110.6,46.45 112.475,48.325 112.475,48.975 ; U5.2@113.225,55.675 112.75,55.675 112.4,55.325 112.4,54.29 112.425,54.265 112.425,49.025 112.475,48.975 ; R1.2@118.175,69.7 117.6,69.7 116.75,68.85 116.75,60.941 116.875,60.816 116.875,58.311 116.675,58.111 116.675,57.135 116.75,57.06 116.75,56.19 115.925,55.365 115.925,54.8 115.85,54.725 115.85,52.35 112.475,48.975
  Bottom Layer w0.25: C9.2@107.8,44.125 108.288,44.125 108.5,44.337 108.5,44.384 v2@109.166,45.05 ; C10.2@107.8,46.025 108.775,45.05 v2@109.166,45.05 ; C4.2@110.5,47.4 109.85,47.4 109.275,46.825 v2(109.275,45.05) v2@109.166,45.05
+3.3VD: C2.2 C5.2 C6.2 C7.2 C13.2 C19.2 C20.2 C21.2 C22.2 C23.2 C24.2 D5.2 DEBUG.1 R2.2 R5.1 R7.1 R9.1 R11.1 U1.1 U1.32 U1.64 U2.5 U4.14 U12.14 U13.14 U14.14 U15.14 U16.14 U17.14 | length 292.8
  Top Layer w0.25: C19.2@59.175,76.775 U12.14@60.975,76.775 60.975,75.764 63.064,73.675 64.409,73.675 65.355,72.729 v2(66.928,72.729) ; v1(77.775,40.925) 77.775,38.95 77.4,38.575 U13.14@77.4,38.15 C22.2@79.525,38.15 ; v5(79.429,41.502) 79.429,41.529 79.75,41.85 80.675,41.85 84.1,45.275 v1(84.925,45.275) 86.725,45.275 86.925,45.475 DEBUG.1@88.575,45.475 ; v2(97.655,49.277) 97.657,49.275 98.05,49.275 98.225,49.1 U1.32@98.225,48.55 ; U4.14@101.325,31.625 102.4,31.625 102.8,32.025 v1(102.8,32.45) ; v1(105.725,35.75) U1.64@105.725,37.1 ; R7.1@106.775,27.6 106.775,26.975 107.325,26.425 115.95,26.425 117.1,27.575 117.1,30.375 114.225,33.25 v2@113.375,33.25 ; R11.1@106.775,31.625 106.75,31.6 106.75,31 107.175,30.575 111.525,30.575 113.35,32.4 v2(113.35,33.25) ; U1.1@107.7,39.075 107.7,37.566 109.191,36.075 v1(109.225,36.075) 111.95,36.075 113.15,34.875 U2.5@113.15,34.45 ; R9.1@109.85,33.525 109.925,33.6 109.925,34.275 110.1,34.45 U2.5@113.15,34.45 ; R5.1@113.15,29.475 113.2,29.525 113.2,30.375 113.875,31.05 113.875,32.75 v2@113.375,33.25 ; v1(117.375,61.2) 118.35,61.2 118.45,61.3 D5.2@119.6,61.3 ; R2.2@118.15,66.325 119.575,64.9 119.6,64.925 119.775,64.75 120.003,64.978 120.153,64.828 v1(123.231,64.828) ; U2.5@113.15,34.45 113.15,34 113.35,33.8 v2(113.35,33.25) ; v2(113.35,33.25) v2@113.375,33.25
  Signal Layer 2 w0.25: v2(66.928,72.729) 72.629,67.028 72.629,66.169 74.648,64.15 81.934,64.15 82.334,63.75 90.009,63.75 90.234,63.975 91.834,63.975 91.984,64.125 93.65,64.125 v1(94.45,64.925) 105.684,64.925 106.95,63.659 ; v2(97.655,49.277) 106.273,49.277 108.3,47.25 108.475,47.25 110.275,45.45 110.275,40.409 108.3,38.434 108.3,38.325 v1(105.725,35.75) 105.725,35.312 102.863,32.45 v1(102.8,32.45) ; v1(116.475,52.7) 116.425,52.75 116.425,58.734 v1(115.956,59.203) 111.147,59.203 110.525,59.825 109.641,59.825 108.891,60.575 108.691,60.575 106.95,62.316 106.95,63.659 ; v1(123.231,64.828) 113.439,64.828 113.289,64.978 112.955,64.644 112.955,64.294 112.589,63.928 112.072,63.928 111.722,64.278 107.569,64.278 106.95,63.659
  Signal Layer 1 w0.25: v1(77.775,40.925) 78.352,41.502 v5(79.429,41.502) ; v1(84.925,45.275) 88.45,48.8 95.118,48.8 95.555,49.236 95.921,49.602 96.439,49.602 96.77,49.27 97.648,49.27 v2(97.655,49.277) ; v1(86.325,31.7) 89.541,31.7 89.791,31.45 90.309,31.45 91.735,32.877 94.45,32.877 94.626,32.7 99.841,32.7 101.225,34.084 v2(101.225,35.45) ; v1(105.725,35.75) 105.85,35.875 106.625,35.875 108.075,37.325 108.075,37.709 108.441,38.075 108.825,38.075 109.075,38.325 109.075,38.359 109.441,38.725 109.475,38.725 109.625,38.875 109.625,39.759 109.991,40.125 110.486,40.125 116.1,45.739 116.1,52.325 v1(116.475,52.7) ; 106.025,36.05 109.2,36.05 v1(109.225,36.075) ; v1(115.956,59.203) 115.956,59.794 115.968,59.782 117.375,61.188 v1(117.375,61.2)
  Bottom Layer w0.25: U17.14@65.975,70.9 65.975,71.625 66.928,72.578 v2(66.928,72.729) ; v1(86.325,31.7) 85.5,32.525 C20.2@85.5,33.275 86.55,34.325 88.425,34.325 88.725,34.625 U14.14@88.725,35.2 ; C21.2@91.6,65.75 91.6,65.325 92,64.925 v1(94.45,64.925) ; v2(97.655,49.277) 97.655,48.92 97.975,48.6 C5.2@98.925,48.6 ; v2(101.225,35.45) 102.8,33.875 v1(102.8,32.45) 102.525,32.725 C13.2@101.35,32.725 ; C6.2@104.775,37.125 104.775,36.7 v1(105.725,35.75) 106.675,36.7 C7.2@106.675,37.125 ; U15.14@112.725,58.075 114.4,58.075 114.65,58.325 114.65,58.956 114.897,59.203 v1(115.956,59.203) ; C2.2@113.075,34.45 113.075,34.075 113.35,33.8 v2(113.35,33.25)
  Bottom Layer w0.4: C24.2@65.925,69.1 65.975,69.15 U17.14@65.975,70.9 ; U16.14@89.6,65.75 C21.2@91.6,65.75 ; U15.14@112.725,58.075 112.725,57.15 113,56.875 C23.2@113,55.95
BATTERY_STATUS: U1.17 U5.1 | length 14.2
  Top Layer w0.25: U1.17@105.725,48.55 109.45,48.55 109.925,49.025 110.634,49.025 111.825,50.216 111.825,52.331 111.925,52.431 111.925,53.05 111.925,56.1 112.45,56.625 U5.1@113.225,56.625
BUT_1: C15.2 D16.2 R6.1 U4.1 | length 47
  Top Layer w0.25: v4(94.155,31.652) 95.498,31.652 U4.1@95.525,31.625 ; R6.1@113.15,27.675 113.15,27.25 113.525,26.875 115.184,26.875 116.575,28.266 116.575,29.8 v1(115.425,30.95)
  Signal Layer 1 w0.25: v4(94.155,31.652) 93.666,31.652 93.64,31.625 93.45,31.625 93.08,31.255 93.08,31.018 92.4,30.338 92.4,29.85 92.475,29.775 92.475,28.316 93.741,27.05 94.259,27.05 94.834,27.625 102.366,27.625 102.691,27.3 103.209,27.3 103.438,27.071 113.271,27.071 114.075,27.875 114.075,29.6 v1(115.425,30.95)
  Bottom Layer w0.25: v4(94.155,31.652) 94.177,31.652 94.55,32.025 C15.2@95.3,32.025 ; D16.2@111.6,28.525 111.6,29.75 112.8,30.95 v1(115.425,30.95)
BUT_2: C16.2 D18.2 R10.1 U4.3 | length 26.6
  Top Layer w0.25: v2(94.155,30.126) 94.208,30.18 95.38,30.18 U4.3@95.525,30.325 ; v1(107.8,35.425) 108.336,35.425 109.125,34.636 109.125,32.915 109.875,32.165 R10.1@109.875,31.725
  Signal Layer 1 w0.25: v2(94.155,30.126) 94.28,30.126 94.503,30.35 99.4,30.35 102.35,33.3 104.375,33.3 106.5,35.425 v1(107.8,35.425)
  Bottom Layer w0.25: v2(94.155,30.126) 94.876,30.126 95.001,30.001 C16.2@95.325,30.325 ; v1(107.8,35.425) 107.8,34.525 108.3,34.025 D18.2@108.3,32.575
BUT_3: C17.2 D17.2 R8.1 U4.5 | length 18.3
  Top Layer w0.25: v2(94.15,29.025) U4.5@95.525,29.025 ; v1(104,29.9) 105.675,29.9 106.125,29.45 106.725,29.45 R8.1@106.775,29.5
  Signal Layer 1 w0.25: v2(94.15,29.025) 95.025,29.9 v1(104,29.9)
  Bottom Layer w0.25: v2(94.15,29.025) 94.55,28.625 C17.2@95.325,28.625 ; v1(104,29.9) 104.85,29.9 105.225,29.525 D17.2@105.225,28.55
BUT_4: C18.2 D19.2 R12.1 U4.13 | length 10.7
  Top Layer w0.25: U4.13@101.325,30.975 v1(102.7,30.975) 104.3,32.575 106.5,32.575 106.775,32.85 R12.1@106.775,33.525
  Bottom Layer w0.25: C18.2@102.7,29.5 v1(102.7,30.975) 103.3,30.975 103.675,31.35 104.8,31.35 D19.2@104.825,31.325
BUTTON_1: BUTTONS.1 D16.1 R5.2 R6.2 | length 36.2
  Top Layer w0.2: 121.732,47.05 121.882,47.2 122.195,47.2 122.445,47.45
  Top Layer w0.25: R6.2@114.5,27.675 115.1,27.675 v1(115.95,28.525) 115.1,29.375 R5.2@114.5,29.375 ; v2(121.325,47.05) 121.732,47.05 ; 122.445,47.45 BUTTONS.1@122.445,48.315
  Signal Layer 1 w0.25: v1(115.95,28.525) 117.25,29.825 117.25,31.299 119.051,33.1 123.4,33.1 124.25,33.95 124.25,42.814 124.667,43.231 124.667,46.614 124.675,46.622 124.675,47.078 124.667,47.086 124.667,47.4 123.391,47.4 122.731,46.74 122.215,47.256 ; v2(121.325,47.05) 122.3,47.05
  Bottom Layer w0.25: D16.1@114.5,28.525 v1(115.95,28.525)
BUTTON_2: BUTTONS.2 D18.1 R9.2 R10.2 | length 27.3
  Top Layer w0.25: R9.2@111.2,33.525 111.675,33.525 v2(112.625,32.575) 111.675,31.625 R10.2@111.225,31.625 ; BUTTONS.2@122.445,45.315 123.98,46.85 v2(124.125,46.85)
  Signal Layer 1 w0.25: v2(112.625,32.575) 112.625,33.409 116.316,37.1 117.95,37.1 123.8,42.95 123.8,43.924 124.125,44.249 v2(124.125,46.85)
  Bottom Layer w0.25: D18.1@111.2,32.575 v2(112.625,32.575)
BUTTON_3: BUTTONS.3 D17.1 R7.2 R8.2 | length 25.2
  Top Layer w0.25: R7.2@108.125,27.6 108.625,27.6 v1(109.575,28.55) 108.625,29.5 R8.2@108.125,29.5
  Top Layer w0.4: v1(120.6,38.8) 120.6,40 121.3,40.7 122.125,40.7 122.45,41.025 122.45,42.31 BUTTONS.3@122.445,42.315
  Signal Layer 1 w0.25: v1(109.575,28.55) 110.35,28.55 v1(120.6,38.8)
  Bottom Layer w0.25: D17.1@108.125,28.55 v1(109.575,28.55)
BUTTON_4: BUTTONS.4 D19.1 R11.2 R12.2 | length 28.3
  Top Layer w0.25: v1(106.725,34.725) 108.4,34.725 108.675,34.45 108.675,32.729 108.8,32.604 108.8,32.3 R11.2@108.125,31.625 108.125,32.675 108.05,32.75 R12.2@108.05,33.525 ; v2(118.831,38.827) 118.831,38.494 119.375,37.95 121.875,37.95 122.445,38.52 BUTTONS.4@122.445,39.315
  Signal Layer 1 w0.25: v1(106.725,34.725) 113.1,34.725 117.202,38.827 v2(118.831,38.827)
  Bottom Layer w0.25: D19.1@104.825,34.225 105.625,34.225 106.125,34.725 v1(106.725,34.725)
D1.1.E.1: "THUMB 1.3" D22.1 | length 34.4
  Top Layer w0.4: 67.395,42.19 67.395,42.845 67.95,43.4 68.95,43.4 69.55,44 69.55,46.014 69.9,46.364 69.9,47.737 72.663,50.5 73.212,50.5 73.237,50.475 74.313,50.475 74.338,50.5 75.288,50.5 75.538,50.25 76.911,50.25 77.139,50.477 77.719,50.477 77.894,50.302 93.777,50.302 94.55,51.075 D22.1@94.55,51.85 D22.1@94.5,51.9
D1.1.E.2: "THUMB 1.4" D23.1 | length 21.6
  Top Layer w0.4: 67.395,45.19 67.395,45.445 69.3,47.35 69.3,47.986 72.414,51.1 73.46,51.1 73.485,51.075 74.065,51.075 74.09,51.1 77.945,51.1 78.142,50.902 84.702,50.902 84.975,51.175 D23.1@84.975,51.925 D23.1@84.925,51.875
D1.1.F.1: "THUMB 1.1" D20.1 | length 13.1
  Top Layer w0.4: 67.395,36.19 69.115,36.19 69.675,36.75 69.675,38.69 72.86,41.875 75.475,41.875 75.9,42.3 D20.1@75.9,43.275
D1.1.F.2: "THUMB 1.2" D21.1 | length 46.2
  Top Layer w0.4: 67.395,39.19 70.15,41.945 70.15,45.766 70.459,46.075 70.49,46.075 70.5,46.085 70.5,47.489 72.911,49.9 72.963,49.9 72.988,49.875 74.562,49.875 74.587,49.9 75.04,49.9 75.863,49.077 78.452,49.077 78.627,49.252 94.899,49.252 95.724,50.077 96.687,50.077 97.23,50.62 97.23,50.702 98.353,51.825 D21.1@104.55,51.825
D1.2.E.1: "THUMB 1.7" D26.1 | length 19.9
  Top Layer w0.4: 67.395,54.19 70.48,57.275 72.294,57.275 72.444,57.125 73.106,57.125 73.306,56.925 74.149,56.925 74.349,57.125 77.151,57.125 77.651,56.625 81.185,56.625 82.31,57.75 83.725,57.75 D26.1@84.7,58.725
D1.2.E.2: "THUMB 1.8" D27.1 | length 8.9
  Top Layer w0.4: 67.395,57.19 69.546,57.19 70.231,57.875 71.875,57.875 72.075,58.075 72.075,58.215 72.66,58.8 D27.1@75.5,58.8
D1.2.F.1: "THUMB 1.5" D24.1 | length 14.5
  Top Layer w0.4: 67.395,48.19 67.395,49.445 67.705,49.755 68.996,49.755 69.319,50.077 v1(70.353,50.077) ; D24.1@75.75,52.175 77.525,52.175 v1(77.6,52.1)
  Bottom Layer w0.4: v1(70.353,50.077) 75.618,50.077 77.6,52.059 v1(77.6,52.1)
D1.2.F.2: "THUMB 1.6" D25.1 | length 47.3
  Top Layer w0.4: 67.395,51.19 68.69,51.19 69.025,51.525 69.025,52.725 69.775,53.475 69.775,55.631 70.619,56.475 71.962,56.475 72.112,56.325 74.398,56.325 74.598,56.525 76.902,56.525 77.402,56.025 81.716,56.025 82.641,56.95 90.059,56.95 90.484,56.525 102.069,56.525 102.169,56.625 102.831,56.625 103.181,56.275 105.981,56.275 106.131,56.425 106.7,56.425 107.775,57.5 D25.1@107.775,58.625
D1.3.E.1: "THUMB 2.3" D31.1 | length 36.8
  Top Layer w0.4: D31.1@81.75,73.85 83.15,73.85 v2(83.475,73.525)
  Signal Layer 1 w0.6: v1(65.125,54.175) 64.25,55.05 64.25,61.65 66.703,64.103 66.703,65.235 67.172,65.703 67.865,65.703 67.894,65.675 69.188,65.675 74.581,71.069 81.019,71.069 v2(83.475,73.525)
  Bottom Layer w0.4: v1(65.125,54.175) 65.135,54.185 67.395,54.185
D1.3.E.2: "THUMB 2.4" D32.1 | length 32.9
  Top Layer w0.4: D32.1@72.1,73.85 73.5,73.85 v2(73.65,73.7)
  Signal Layer 1 w0.6: v1(64.45,53.525) 63.45,54.525 63.45,61.981 65.903,64.435 65.903,65.566 66.912,66.575 67.194,66.575 69.019,68.4 70.781,68.4 74.55,72.169 74.55,73 74.022,73.529 73.821,73.529 v2(73.65,73.7)
  Bottom Layer w0.4: v1(64.45,53.525) 64.45,52.725 65.99,51.185 67.395,51.185
D1.3.E.3: "THUMB 2.5" D33.1 | length 28.5
  Top Layer w0.4: D33.1@71.65,66.6 71.725,66.525 71.728,66.528 v2(73.254,66.528)
  Bottom Layer w0.4: 67.395,48.185 65.39,48.185 63.6,49.975 63.6,59.825 69.55,65.775 72.5,65.775 v2(73.254,66.528)
D1.3.F.1: "THUMB 1.9" D28.1 | length 28.3
  Top Layer w0.4: 67.395,60.19 67.475,60.27 67.475,61.35 68.6,62.475 68.6,62.49 70.26,64.15 81.379,64.15 81.726,63.803 85.753,63.803 86.45,64.5 86.45,66.531 86.819,66.9 89.333,66.9 89.508,66.725 90.375,66.725 D28.1@90.65,67
D1.3.F.2: "THUMB 2.1" D29.1 | length 18.4
  Top Layer w0.4: v2(80.25,66.75) D29.1@81.975,66.75
  Bottom Layer w0.4: 67.395,60.185 67.395,61.295 70.325,64.225 78.167,64.225 78.825,64.883 78.825,65.34 79.235,65.75 79.483,65.75 80.25,66.517 v2(80.25,66.75)
D1.3.F.3: "THUMB 2.2" D30.1 | length 38.5
  Top Layer w0.4: v1(89.804,73.954) 90.596,73.954 90.625,73.925 90.65,73.95 91.675,73.95 D30.1@91.725,74
  Signal Layer 1 w0.6: v1(65.125,57.175) 65.125,60.481 74.913,70.269 81.35,70.269 84.275,73.194 84.275,73.656 85.094,74.475 85.756,74.475 86.306,73.925 86.335,73.954 v1(89.804,73.954)
  Bottom Layer w0.4: v1(65.125,57.175) 65.135,57.185 67.395,57.185
D1.AB.1: "THUMB 2.6" D34.1 | length 40
  Signal Layer 1 w0.6: v1(42.2,30.775) 42.2,30.526 45.001,27.725 52.794,27.725 54.894,29.825 56.194,29.825 56.819,30.45 57.75,30.45 65.15,37.85 v1(65.15,45.175)
  Bottom Layer w0.4: D34.1@40.35,30.775 v1(42.2,30.775) ; v1(65.15,45.175) 67.385,45.175 67.395,45.185
D1.AB.2: "THUMB 2.7" D35.1 | length 15.7
  Bottom Layer w0.4: D35.1@65.25,29.85 65.25,30.875 63.975,32.15 63.975,41.175 64.985,42.185 67.395,42.185
D1.AD.1: "THUMB 2.8" D36.1 | length 16.9
  Bottom Layer w0.4: 67.395,39.185 65.585,39.185 64.575,38.175 64.575,34.575 65.225,33.925 68.337,33.925 72.412,29.85 D36.1@72.65,29.85
D1.AD.2: "THUMB 2.9" D37.1 | length 11.8
  Top Layer w0.4: D37.1@72.675,30.225 73.95,30.225 74.35,30.625 v1(74.35,31.2)
  Bottom Layer w0.4: 67.395,36.185 67.564,36.185 69.575,34.174 69.575,33.535 71.91,31.2 v1(74.35,31.2)
D2.1.E: D39.1 INDEX.2 | length 34.3
  Top Layer w0.4: v1(51.925,36.2) 51.935,36.19 INDEX.2@54.22,36.19 ; v1(78.225,29.1) 78.6,29.1 79.025,28.675 D39.1@79.025,27.425
  Signal Layer 2 w0.6: v1(51.925,36.2) 56.875,31.25 57.813,31.25 58.75,30.313 58.75,29.375 59.025,29.1 v1(78.225,29.1)
D2.1.F: D38.1 INDEX.1 | length 16.1
  Top Layer w0.4: D38.1@40.35,27.875 44.475,27.875 48.25,31.65 50.825,31.65 52.365,33.19 INDEX.1@54.22,33.19
D2.2.E: D41.1 INDEX.4 | length 40.4
  Top Layer w0.25: v1(82.475,32.15) 83.025,32.7 D41.1@84.125,32.7
  Top Layer w0.4: v1(51.975,42.2) 54.21,42.2 INDEX.4@54.22,42.19
  Signal Layer 2 w0.6: v1(63.175,38.5) 63.225,38.5 68.348,33.377 68.985,33.377 70.31,32.052 74.323,32.052 74.421,32.15 77.168,32.15 77.791,31.527 79.96,31.527 80.584,32.15 v1(82.475,32.15)
  Signal Layer 1 w0.6: v1(51.975,42.2) 61.175,42.2 63.175,40.2 v1(63.175,38.5)
D2.2.F: D40.1 INDEX.3 | length 28
  Top Layer w0.4: v1(51.925,39.2) 54.21,39.2 INDEX.3@54.22,39.19 ; D40.1@65.25,26.95 66.25,26.95 66.875,27.575 66.875,32.25 v1(67.5,32.875)
  Signal Layer 2 w0.6: v1(62.825,37.6) 62.775,37.6 v1(67.5,32.875)
  Signal Layer 1 w0.6: v1(51.925,39.2) 61.225,39.2 v1(62.825,37.6)
D2.3.E.1: D44.1 INDEX.7 | length 35.1
  Top Layer w0.4: v1(51.95,51.2) 54.21,51.2 INDEX.7@54.22,51.19
  Signal Layer 1 w0.6: v1(51.95,51.2) 59.1,51.2 63.3,47 75.375,47 v1(78.675,43.7)
  Bottom Layer w0.4: D44.1@75.9,43.275 78.375,43.275 78.675,43.575 v1(78.675,43.7)